# Altium PCB PCB1.PcbDoc
Units mil, origin at the board's own origin, x right, y up, seen from the top; angles counter-clockwise.
Board outline 2745 x 2050 mil, 2 copper layers (Top Layer, Bottom Layer); 4 components, 3 nets, 60 pads, 0 vias.
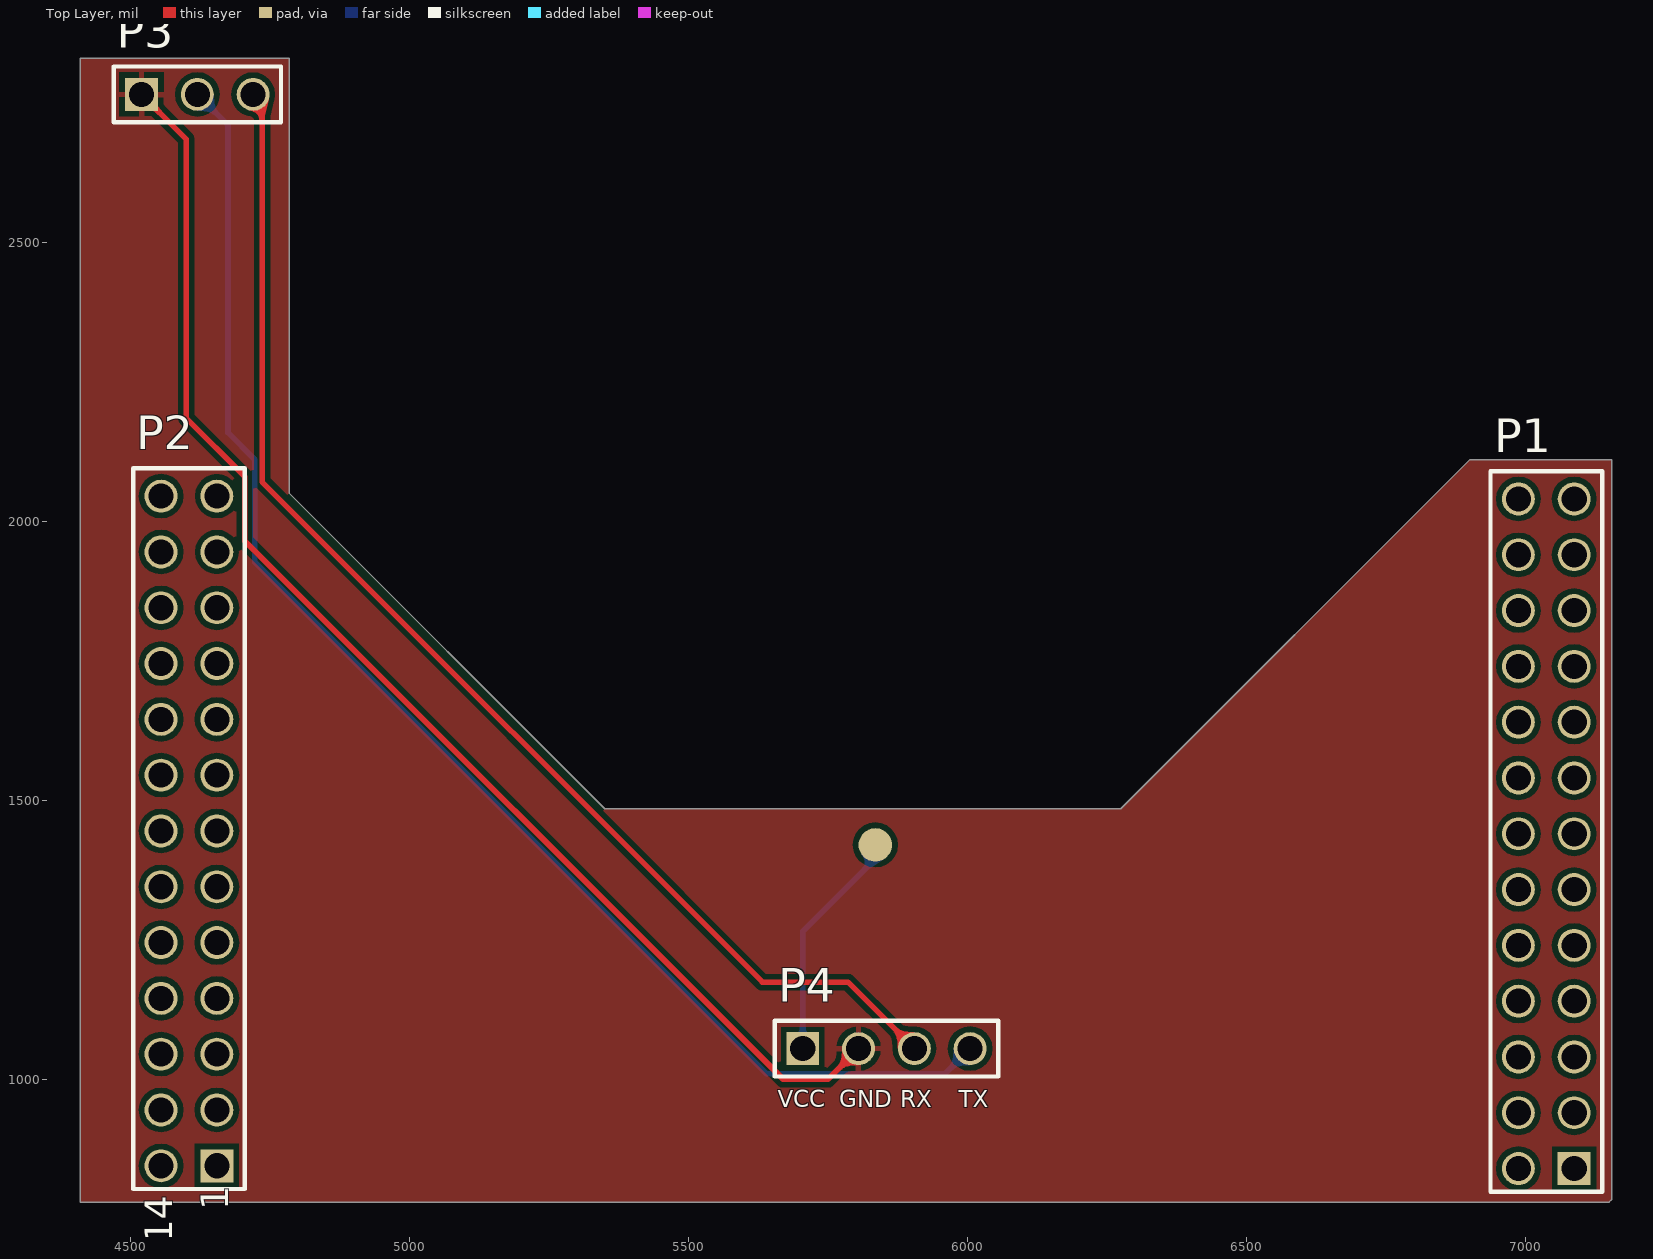
[diagram p0: Top Layer view]
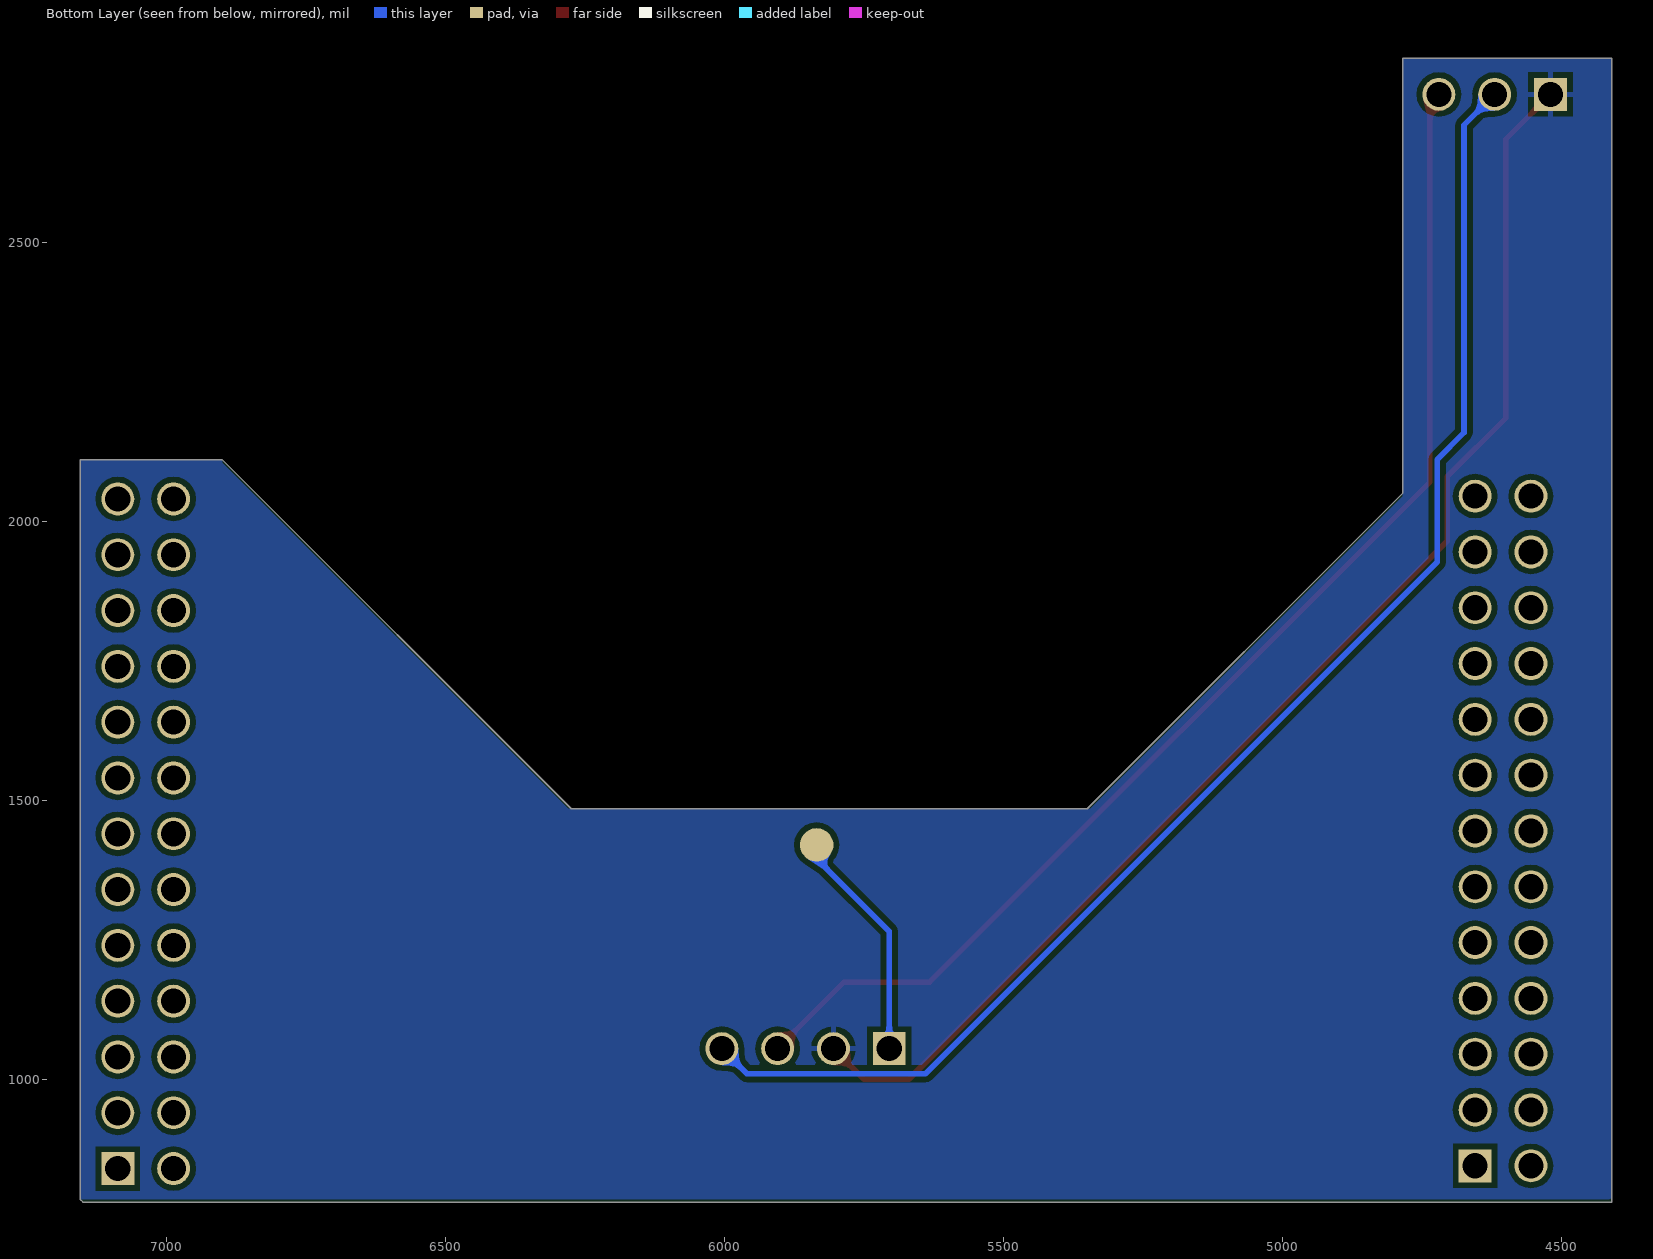
[diagram p1: Bottom Layer view, seen from below]

## Layer stack, top to bottom
Top Solder: solder mask 0.4, Solder Resist, Dk 3.5
Top Layer: signal copper 1.4
Dielectric 1: dielectric 12.6, FR-4, Dk 4.8
Bottom Layer: signal copper 1.4
Bottom Solder: solder mask 0.4, Solder Resist, Dk 3.5

## Board outline
4410,780 4410,2830 4785,2830 4785,2050 5350,1485 6275,1485 6900,2110 7155,2110 7155,785 7150,780

## Design rules (kind name [scope] priority, off if disabled: settings)
Clearance [All] p1: gap=10 ignorepadtopadclearanceinfootprint=FALSE except(0: Arc-Hole Track-Hole SMDPad-Hole THPad-Hole Via-Hole Fill-Hole Poly-Hole Region-Hole Text-Hole)
PolygonConnect [All] p1: connectstyle=Relief reliefconductorwidth=10 reliefentries=4 polygonreliefangle="90 Angle" airgapwidth=10
RoutingVias [All] p1: holewidth=28 width=50 viastyle="Through Hole" minholewidth=28 minwidth=50 maxholewidth=28 maxwidth=50
SolderMaskExpansion [All] p1: expansion=4 istentingtop=FALSE
Width [All] p1: maxlimit=10 minlimit=10 preferedwidth=10
30 further rules are at their usual default settings.

## Components (designator, comment, footprint, x,y, rotation, side; value= is the part's Value field where it differs from the comment)
P1 "Header 13X2A" HDR2X13_CEN 7087.5,840 r90 top
P2 "Header 13X2A" HDR2X13_CEN 4655,845 r90 top
P3 "Header 3" HDR1X3 4520,2765 r0 top
P4 "Header 4" HDR1X4 5705,1055 r0 top

## Footprints (in the part's own frame and the unit in brackets; to place one, negate y for a bottom-side part, rotate by r counter-clockwise, add the part's x,y. Pads: shape width x height; smd on the part's side, far side on the other; paste and mask are expansions set on the pad)
HDR1X3 [mm] "Connector; Header; 3 Position"
  rect 1.5x1.5 hole 1.143: 1(0,0)
  round 1.5 hole 1.143: 2(2.54,0) 3(5.08,0)
  silkscreen extent -1.27,-1.27 6.35,1.27
HDR1X4 [mm] "Connector; Header; 4 Position"
  rect 1.5x1.5 hole 1.143: 1(0,0)
  round 1.5 hole 1.143: 2(2.54,0) 3(5.08,0) 4(7.62,0)
  silkscreen extent -1.27,-1.27 8.89,1.27
HDR2X13_CEN [mm] "Connector; Header; 13x2 Position"
  rect 1.5x1.5 hole 1.143: 1(0,0)
  round 1.5 hole 1.143: 2(2.54,0) 3(5.08,0) 4(7.62,0) 5(10.16,0) 6(12.7,0) 7(15.24,0) 8(17.78,0) 9(20.32,0) 10(22.86,0) 11(25.4,0) 12(27.94,0) 13(30.48,0) 14(0,2.54) 15(2.54,2.54) 16(5.08,2.54) 17(7.62,2.54) 18(10.16,2.54) 19(12.7,2.54) 20(15.24,2.54) 21(17.78,2.54) 22(20.32,2.54) 23(22.86,2.54) 24(25.4,2.54) 25(27.94,2.54) 26(30.48,2.54)
  silkscreen extent -1.06,-1.27 31.75,3.81

## Part data
P1 P2: "Header, 13-Pin, Dual row", LatestRevisionDate=17-Jul-2002, LatestRevisionNote="Re-released for DXP Platform.", Publisher="Altium Limited"
P3: "Header, 3-Pin", LatestRevisionDate=17-Jul-2002, LatestRevisionNote="Re-released for DXP Platform.", Publisher="Altium Limited"
P4: "Header, 4-Pin", LatestRevisionDate=17-Jul-2002, LatestRevisionNote="Re-released for DXP Platform.", Publisher="Altium Limited"

## Free pads (board coordinates)
  round 60 all layers, no hole: 87(5835,1420)

## Nets (pads, with @x,y where several pads share a name; then routed paths per layer and width w, separated by ;. In a path a pad name is that pad's centre, name@x,y a point inside that pad or via, vN(x,y) a via of type N, cw(c..) or ccw(c..) an arc to the next point about the centre after c; other vN are vias at no path point)
GND: P3.1 P4.2 | length 2399.1
  Top Layer w10: P3.1 4600,2685 4600,2185 4705,2080 4705,1965 5670,1000 5750,1000 P4.2
RX: P3.3 P4.3 | length 2300
  Top Layer w10: P3.3 4736,2765 4736,2070.71 5632.71,1174 5786,1174 P4.3
TX: P3.2 P4.4 | length 2561.1
  Bottom Layer w10: P3.2 4675,2710 4675,2158.75 4723,2110.75 4723,1927 5640,1010 5960,1010 P4.4
pads on no net: P1.1 P1.2 P1.3 P1.4 P1.5 P1.6 P1.7 P1.8 P1.9 P1.10 P1.11 P1.12 P1.13 P1.14 P1.15 P1.16 P1.17 P1.18 P1.19 P1.20 P1.21 P1.22 P1.23 P1.24 P1.25 P1.26 P2.1 P2.2 P2.3 P2.4 P2.5 P2.6 P2.7 P2.8 P2.9 P2.10 P2.11 P2.12 P2.13 P2.14 P2.15 P2.16 P2.17 P2.18 P2.19 P2.20 P2.21 P2.22 P2.23 P2.24 P2.25 P2.26 P4.1
copper on no net: | length 428
  Bottom Layer w10: 5705,1055 5705,1265 5845,1405 5845,1425

## Polygon pours and split planes (outlines as drawn)
GND on Top Layer "GND_L01_P001" (solid, pour order 1): 4410,2830 4785,2830 4785,2050 5350,1485 6275,1485 6900,2110 7155,2110 7155,785 7150,780 4410,780
GND on Bottom Layer "GND_L02_P002" (solid, pour order 2): 4410,2830 4785,2830 4785,2045 5345,1485 6280,1485 6900,2105 6900,2110 7155,2110 7155,785 4415,785 4410,780

## Silkscreen, mask and mechanical layers (free items; w line width, h text height)
Top Overlay:
  text "VCC" at 5660,950 h30
  text "GND" at 5770,950 h30
  text "RX" at 5880,950 h30
  text "TX" at 5985,950 h30
Mechanical 1:
  lines w10: 4410,780 4480,780 7150,780 7155,785 7155,2110 6900,2110 6275,1485 5350,1485 4785,2050 4785,2830 4410,2830 4410,780

## Text inside footprints (layer, text, board x,y; h text height)
P2: Top Overlay "14" at 4575,705 h50 r90; Top Overlay "1" at 4675,765 h50 r90